# Altium PCB V1.2-扩展板.PcbDoc
Units mil, origin at the board's own origin, x right, y up, seen from the top; angles counter-clockwise.
Board outline 465.03 x 600.03 mil, 4 copper layers (Top Layer, GND, PWR, Bottom Layer), stack 61.583 mil thick; 9 components, 9 nets, 38 pads, 9 vias.
Unrouted connection lines stored in the file: 55.
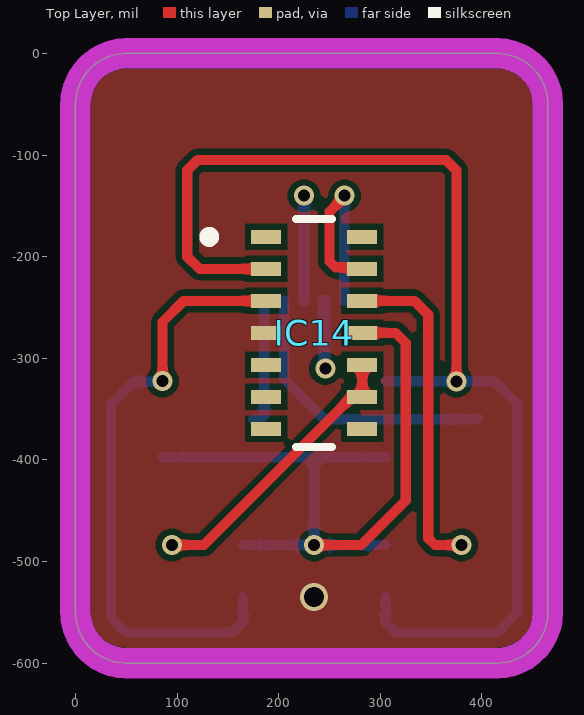
[diagram p0: Top Layer view]
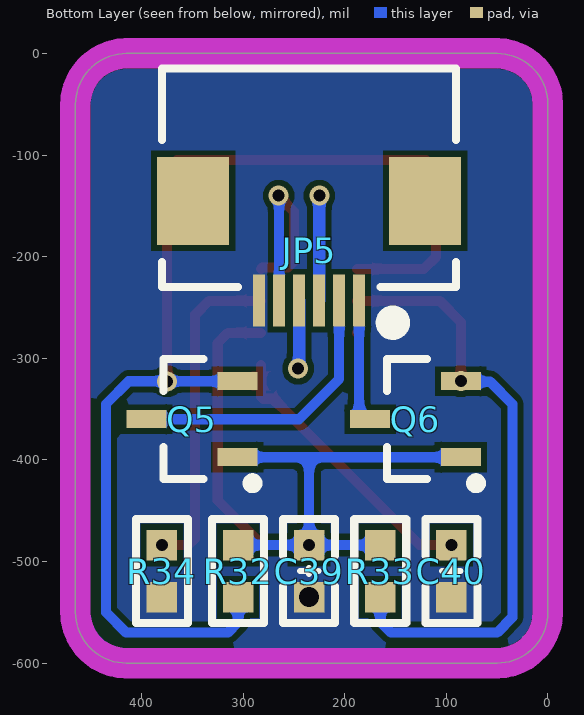
[diagram p1: Bottom Layer view, seen from below]
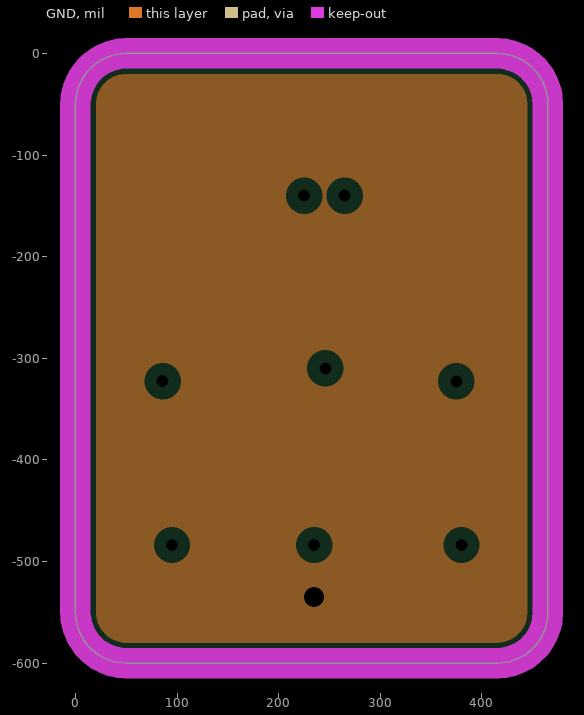
[diagram p2: GND, clearances drawn from the general rule]
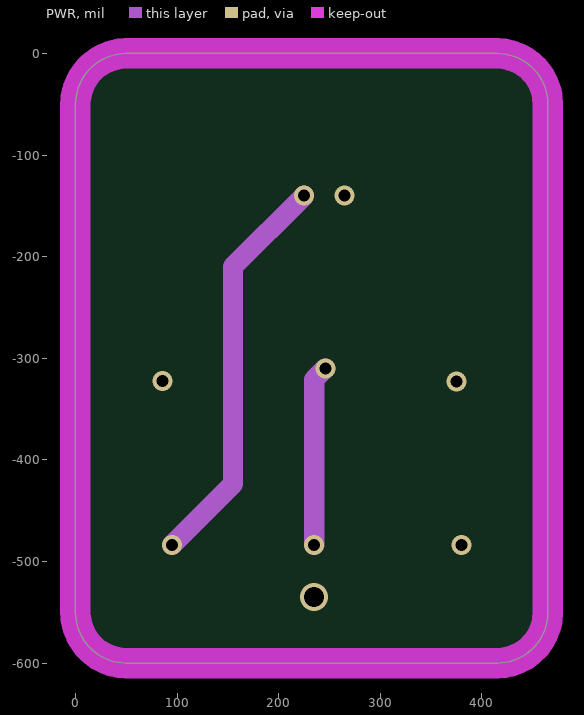
[diagram p3: PWR]
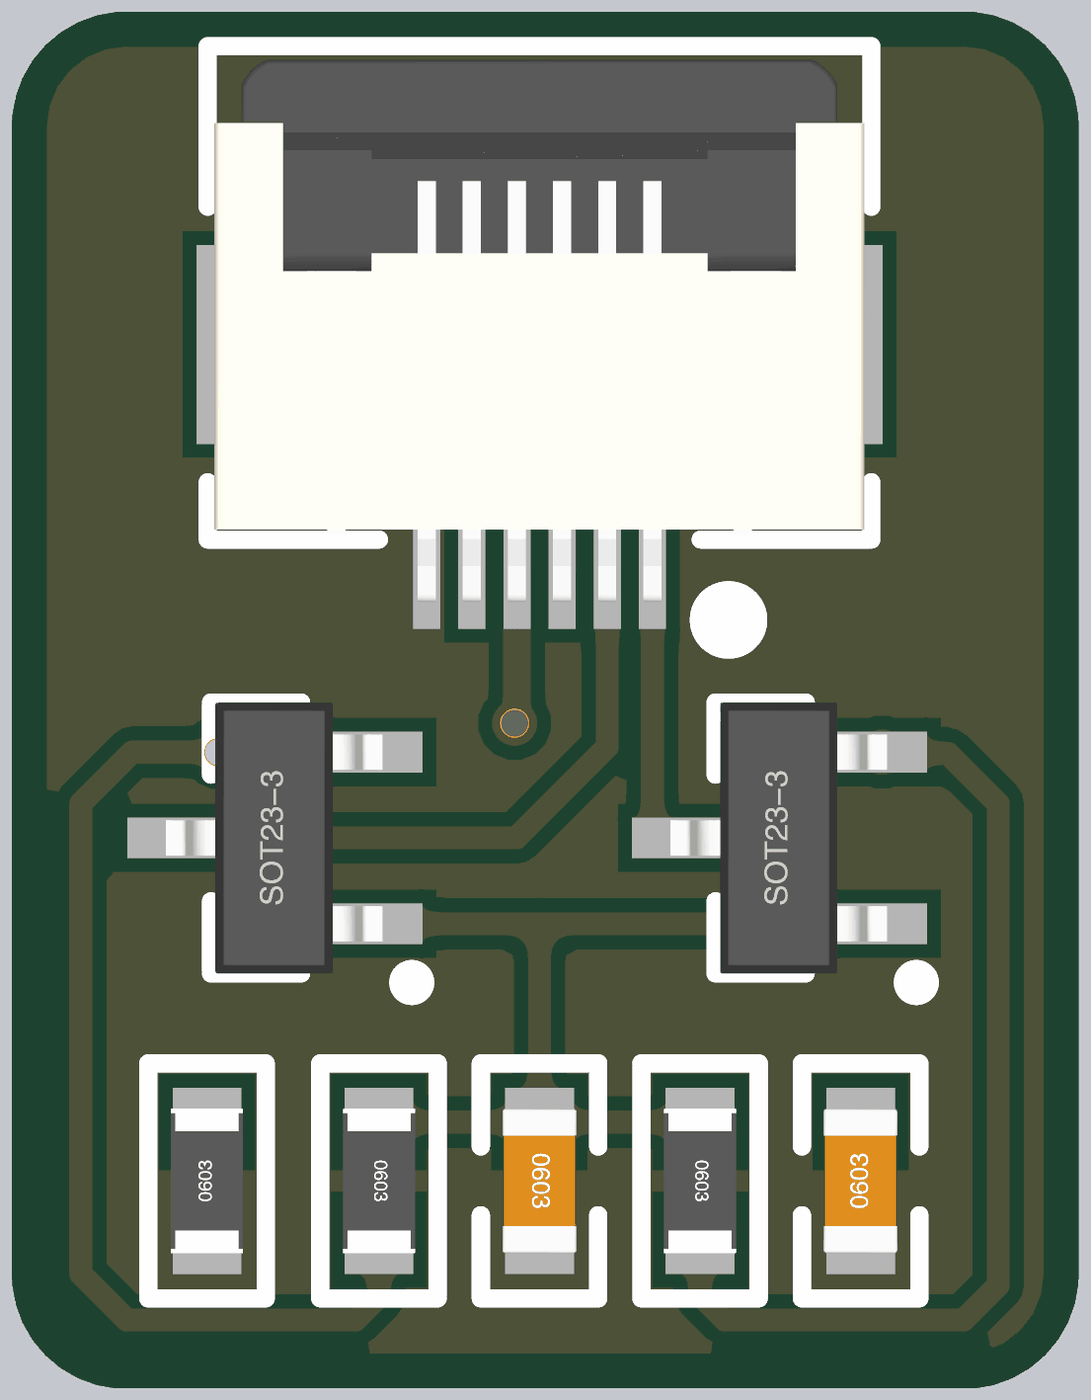
[diagram p4: 3D render of the assembled board from below, using the file's embedded part models]

## Layer stack, top to bottom
Top Solder: solder mask 0.3941, Solder Resist, Dk 3.3
Top Layer: signal copper 1.378
Dielectric 1: prepreg 3.9134, PP, Dk 4.5
GND: plane copper 0.5984, net GND
Dielectric 2: core 49.8031, core, Dk 4.5
PWR: signal copper 0.5984
Dielectric 3: prepreg 3.9134, PP, Dk 4.5
Bottom Layer: signal copper 1.378
Bottom Solder: solder mask 0.3941, Solder Resist, Dk 3.3

## Board outline
50.04,-600.01 cw(c50.04,-549.96) -0.01,-549.96 -0.01,-50.04 cw(c50.04,-50.04) 50.04,0.01 414.96,0.01 cw(c414.96,-50.04) 465.02,-50.04 465.02,-549.96 cw(c414.96,-549.96) 414.96,-600.01

## Design rules (kind name [scope] priority, off if disabled: settings)
Clearance 铺铜 [OnLayer('PWR') AND  InPoly vs OnLayer('PWR')] p1: gap=20 ignorepadtopadclearanceinfootprint=TRUE
Clearance [Not OnLayer('Keep-Out Layer') AND Not (InComponent('USB1') AND IsVia) vs Not OnLayer('Keep-Out Layer') AND Not (InComponent('USB1') AND IsVia)] p2: gap=6 ignorepadtopadclearanceinfootprint=TRUE
DiffPairsRouting DiffPair_USBC_DiffPairsRouting [InDifferentialPair ('USBC')] p1: maxlimit=7 minlimit=5 mostfreqgap=5 toplayer_minwidth=5 toplayer_maxwidth=7 toplayer_prefwidth=6 midlayer1_minwidth=5 midlayer1_maxwidth=7 midlayer1_prefwidth=6 bottomlayer_minwidth=5 bottomlayer_maxwidth=7 bottomlayer_prefwidth=6 maxuncoupledlength=500
HoleSize [All] p1: absolutevalues=TRUE maxlimit=248.03 minlimit=7.87 maxpercent=80.000 minpercent=20.000
MatchedLengths DiffPair_USBC_MatchedLengths [InDifferentialPair ('USBC')] p1: tolerance=5 checknetsindiffpair=FALSE checkdiffpairvsdiffpair=TRUE checkxsignals=TRUE checkothers=TRUE
MinimumSolderMaskSliver [NOT InComponent('IC8') AND NOT InComponent('K1') AND NOT InComponent('IC2') AND InDifferentialPairClass('All Differential Pairs') vs NOT InComponent('IC8') AND NOT InComponent('K1') AND NOT InComponent('IC2') AND InDifferentialPairClass('All Differential Pairs')] p1: minsoldermaskwidth=3.15
PlaneClearance [All] p1: clearance=12
PlaneConnect [All] p1: planeconnectstyle=Direct reliefexpansion=20 reliefentries=4 reliefconductorwidth=10 reliefairgap=10
PolygonConnect [All] p1: connectstyle=Direct reliefconductorwidth=10 reliefentries=4 polygonreliefangle="90 Angle" airgapwidth=10
RoutingVias [All] p1: holewidth=16 width=28 viastyle="Through Hole" minholewidth=12 minwidth=25 maxholewidth=24 maxwidth=40
SilkToSilkClearance [All] p1: silktosilkclearance=0
SilkToSolderMaskClearance [IsPad] p1: minsilkscreentomaskgap=0 clearancetoexposedcopper=TRUE
SolderMaskExpansion [IsVia] p1: expansion=4 istentingtop=TRUE
Width [All] p1: maxlimit=100 minlimit=3.5 preferedwidth=20
23 further rules are at their usual default settings.

## Components (designator, comment, footprint, x,y, rotation, side; value= is the part's Value field where it differs from the comment)
C39 "4.7μF" "C 0603_L" 235,-509.41 r270 bottom
C40 "10μF" "C 0603_L" 95,-509.41 r90 bottom
IC14 "MAX30102EFD+" FP-F143A5-1-MFG 235,-275 r0 top
JP5 "FPC1.0-6P" "FPC0.5 2H-WS-6P" 235,-145 r0 bottom
Q5 "2SK3018" SOT23-3L 350.71,-360 r90 bottom
Q6 "2SK3018" SOT23-3L 130.71,-360 r90 bottom
R32 "4.7K" "R 0603_L" 305,-509.41 r270 bottom
R33 "4.7K" "R 0603_L" 165,-509.41 r270 bottom
R34 "0" "R 0603_L" 380,-509.41 r90 bottom

## Footprints (in the part's own frame and the unit in brackets; to place one, negate y for a bottom-side part, rotate by r counter-clockwise, add the part's x,y. Pads: shape width x height; smd on the part's side, far side on the other; paste and mask are expansions set on the pad)
"C 0603_L" [mil] "无极性贴片电容"
  rect 30x30 smd: 1(-25.59,0) 2(25.59,0)
  silkscreen extent -51,-26 51,26, body extent -31,-16 31,16, height 32
FP-F143A5-1-MFG [mm]
  rect 0.75x0.35 smd paste+0 mask+0: 1(-1.2,2.4) 2(-1.2,1.6) 3(-1.2,0.8) 4(-1.2,0) 5(-1.2,-0.8) 6(-1.2,-1.6) 7(-1.2,-2.4) 8(1.2,-2.4) 9(1.2,-1.6) 10(1.2,-0.8) 11(1.2,0) 12(1.2,0.8) 13(1.2,1.6) 14(1.2,2.4)
  silkscreen extent -2.75,-2.85 0.45,2.85, body extent -1.65,-2.8 1.65,2.8, height 1.65
"FPC0.5 2H-WS-6P" [mm] "长：7.2mm，宽：5.2mm，高：2mm"
  rect 1.8x2.2 smd: 0(-2.9,0) 0(2.9,0)
  rect 0.3x1.3 smd: 1(-1.25,2.497) 2(-0.75,2.497) 3(-0.25,2.497) 4(0.25,2.497) 5(0.75,2.497) 6(1.25,2.497)
  silkscreen extent -3.67,-3.3 3.68,3.23, body extent -3.6,-3.15 3.6,2.85, height 2
"R 0603_L" [mil] "1/10W贴片电阻"
  rect 30x30 smd: 1(-25.59,0) 2(25.59,0)
  silkscreen extent -51,-26 51,26, body extent -31,-16 31,16, height 16
SOT23-3L [mm] "3x1.3x1mm(长宽高)"
  rect 0.45x1 smd: 1(-0.95,-1.143) 2(0.95,-1.143) 3(0,1.125)
  silkscreen extent -1.72,-1.65 1.5,0.7, body extent -1.5,-1.2 1.5,1.2, height 1.05

## Part data
C39 C40: library part C, "无极性贴片电容", BOM名称=无极性贴片电容, 学习资源=www.ooocke.com, 版权归属=源创客
IC14: library part MAX30102, "IC SENSOR OXIMETER/HEARTRATE", Manufacturer="Maxim Integrated", Max Junction Temp=+90°C, Max Supply Voltage=2V, Min Supply Voltage=1.7V, Operating Supply Current=600uA, Package=F143A5-1, Temperature="-40°C to +85°C", Temperature Range High=+85°C, Temperature Range Low=-40°C, Automotive=No, Category=IC, ComponentLink2Description=Datasheet, ComponentLink2URL=https://datasheets.maximintegrated.com/en/ds/MAX30102.pdf, Device Class L1=Sensors, Device Class L2=unset, Device Class L3=unset, Digikey Description="IC SENSOR OXIMETER/HEARTRATE", Footprint Url=https://pdfserv.maximintegrated.com/land_patterns/90-0602.PDF, Height=1.65mm, Lead Free=Yes, Manufacturer Part Number=MAX30102EFD+, Mouser Description="Pulse Oximeter/Heart Rate Sensor, Oesip", Octopart=https://octopart.com/max30102efd%2B-maxim+integrated-59568799, RoHS=TRUE, Sensor Output=I2C
JP5: library part FPC-6P, "FPC连接器", BOM名称=FPC连接器, 学习资源=www.ooocke.com, 版权归属=源创客
Q5 Q6: "类型:-;漏源电压(Vdss):-;连续漏极电流(Id):-;功率(Pd):-;导通电阻(RDS(on)@Vgs,Id):-;阈值电压(Vgs(th)@Id):-;栅极电荷(Qg@Vgs):-;输入电容(Ciss@Vds):-;反向传输电容(Crss@Vds):-;", Continuous Drain Current (Id)=-, JLCPCB Part Class="Extended Part", Manufacturer=TWGMC(台湾迪嘉), Add into BOM=yes, Convert to PCB=yes, Datasheet=https://atta.szlcsc.com/upload/public/pdf/source/20200827/C727148_2301BBDB89FCE642A4A39ABEF7075607.pdf, Device=2SK3018, Drain Source On Resistance (RDS(on)@Vgs,Id)=-, Drain Source Voltage (Vdss)=-, Gate Threshold Voltage (Vgs(th)@Id)=-, Input Capacitance (Ciss@Vds)=-, LCSC Part Name=2SK3018, Manufacturer Part=2SK3018, Power Dissipation (Pd)=-, Reverse Transfer Capacitance (Crss@Vds)=-, Supplier=LCSC, Supplier Footprint=SOT-23, Supplier Part=C727148, Symbol=2SK3018_C727148, Total Gate Charge (Qg@Vgs)=-, Type=-
R32 R33 R34: library part R, "贴片电阻", BOM名称=贴片电阻, 学习资源=www.ooocke.com, 版权归属=源创客

## Via types
v1: diameter 19.68, hole 11.81, Top Layer to Bottom Layer, tented both sides, 8 vias
v2: diameter 27.56, hole 19.68, Top Layer to Bottom Layer, tented both sides, 1 vias

## Nets (pads, with @x,y where several pads share a name; then routed paths per layer and width w, separated by ;. In a path a pad name is that pad's centre, name@x,y a point inside that pad or via, vN(x,y) a via of type N, cw(c..) or ccw(c..) an arc to the next point about the centre after c; other vN are vias at no path point)
+1.8V: C39.1 IC14.11 JP5.4 Q5.1 Q6.1 R32.1 R33.1 | length 1001.9
  Top Layer w10: v1(235,-483.82) 281.18,-483.82 325,-440 325,-285 315,-275 IC14.11
  PWR w20: v1(235,-483.82) 235,-320.87 v1(245.84,-310)
  Bottom Layer w10: Q6.1 235,-397.4 ; R33.1 v1(235,-483.82) ; R32.1 v1(235,-483.82) ; Q5.1 235,-397.4 ; v1(235,-483.82) 235,-397.4
  Bottom Layer w12: JP5.4 244.84,-309 v1(245.84,-310)
+5V: C40.2 IC14.9 IC14.10 JP5.3 | length 780.1
  Top Layer w10: v1(94.99,-483.82) 126.18,-483.82 270.12,-339.88 280.35,-339.88 IC14.9 IC14.10
  PWR w20: v1(94.99,-483.82) 155,-423.82 155,-210 v1(225,-140)
  Bottom Layer w10: JP5.3@225.08,-243.23 JP5.3
  Bottom Layer w12: JP5.3@225,-243.15 v1(225,-140)
GND: C39.2 C40.1 IC14.4 JP5.6 R34.1 | length 2.7
  Top Layer w10: IC14.4@185.87,-276.89 IC14.4
  other v2: 235,-535
I2C_SCL: JP5.2 Q5.3 | length 284.7
  Bottom Layer w10: JP5.2 205.47,-320.47 245,-360 Q5.3 Q5.3@396.14,-358.86
I2C_SDA: JP5.1 Q6.3 | length 125.2
  Bottom Layer w10: Q6.3 181.93,-360 185.79,-356.14 JP5.1
MAX_INT: IC14.13 JP5.5 | length 209
  Top Layer w10: v1(265,-140) 265,-140.7 250,-155.7 250,-204.67 255.86,-210.53 280.76,-210.53 IC14.13
  Bottom Layer w10: JP5.5 v1@264.53,-140.47
MAX_SCL: IC14.2 Q5.2 R32.2 | length 1159.8
  Top Layer w10: IC14.2 122.01,-212.01 110,-200 110,-115 120,-105 365,-105 374.92,-114.92 v1(374.92,-322.7)
  Bottom Layer w10: R32.2 305,-560 315,-570 415,-570 435,-550 435,-345 412.6,-322.6 375.02,-322.6 v1(374.92,-322.7) 374.87,-322.65 305.76,-322.65 Q5.2
MAX_SDA: IC14.3 Q6.2 R33.2 | length 603.9
  Top Layer w10: v1(85.71,-322.6) 85.71,-264.29 106.5,-243.5 IC14.3
  Bottom Layer w10: v1(85.71,-322.6) 85.19,-323.12 56.88,-323.12 35,-345 35,-555 50,-570 154.28,-570 165,-559.28 R33.2
NetIC14_12: IC14.12 R34.2 | length 326.2
  Top Layer w10: IC14.12 333.5,-243.5 347.21,-257.21 347.21,-477.21 353.82,-483.82 v1(379.99,-483.82)
pads on no net: IC14.1 IC14.5 IC14.6 IC14.7 IC14.8 IC14.14 JP5.0

## Polygon pours and split planes (outlines as drawn)
GND on Bottom Layer "GND_L04_P001" (solid, remove dead copper, pour order 1): 0,0 465,0 465,-600 0,-600
GND on Top Layer "GND_L01_P000" (solid, remove dead copper, pour order 0): -5,5 470,5 470,-605 -5,-605
GND on GND (split plane): 419.66,-20.36 424.25,-21.46 428.6,-23.27 432.62,-25.73 436.21,-28.79 439.27,-32.38 441.73,-36.4 443.54,-40.75 444.64,-45.34 444.97,-49.53 444.92,-50.04 444.92,-549.96 444.97,-550.47 444.64,-554.66 443.54,-559.25 441.73,-563.6 439.27,-567.62 436.21,-571.21 432.62,-574.27 428.6,-576.73 424.25,-578.54 419.66,-579.64 415.47,-579.97 414.96,-579.92 50.04,-579.92 49.53,-579.97 45.34,-579.64 40.75,-578.54 36.4,-576.73 32.38,-574.27 28.79,-571.21 25.73,-567.62 23.27,-563.6 21.46,-559.25 20.36,-554.66 20.03,-550.47 20.08,-549.96 20.08,-50.04 20.03,-49.53 20.36,-45.34 21.46,-40.75 23.27,-36.4 25.73,-32.38 28.79,-28.79 32.38,-25.73 36.4,-23.27 40.75,-21.46 45.34,-20.36 49.53,-20.03 50.04,-20.08 414.96,-20.08 415.47,-20.03

## Keep-outs
Keep-Out Layer:
  the board outline again, w30